# Altium PCB Motor_Driver.PcbDoc
Units mil, origin at the board's own origin, x right, y up, seen from the top; angles counter-clockwise.
Board outline 6000 x 4000 mil, 2 copper layers (Top Layer, Bottom Layer); 42 components, 46 nets, 176 pads, 0 vias.
Unrouted connection lines stored in the file: 73.
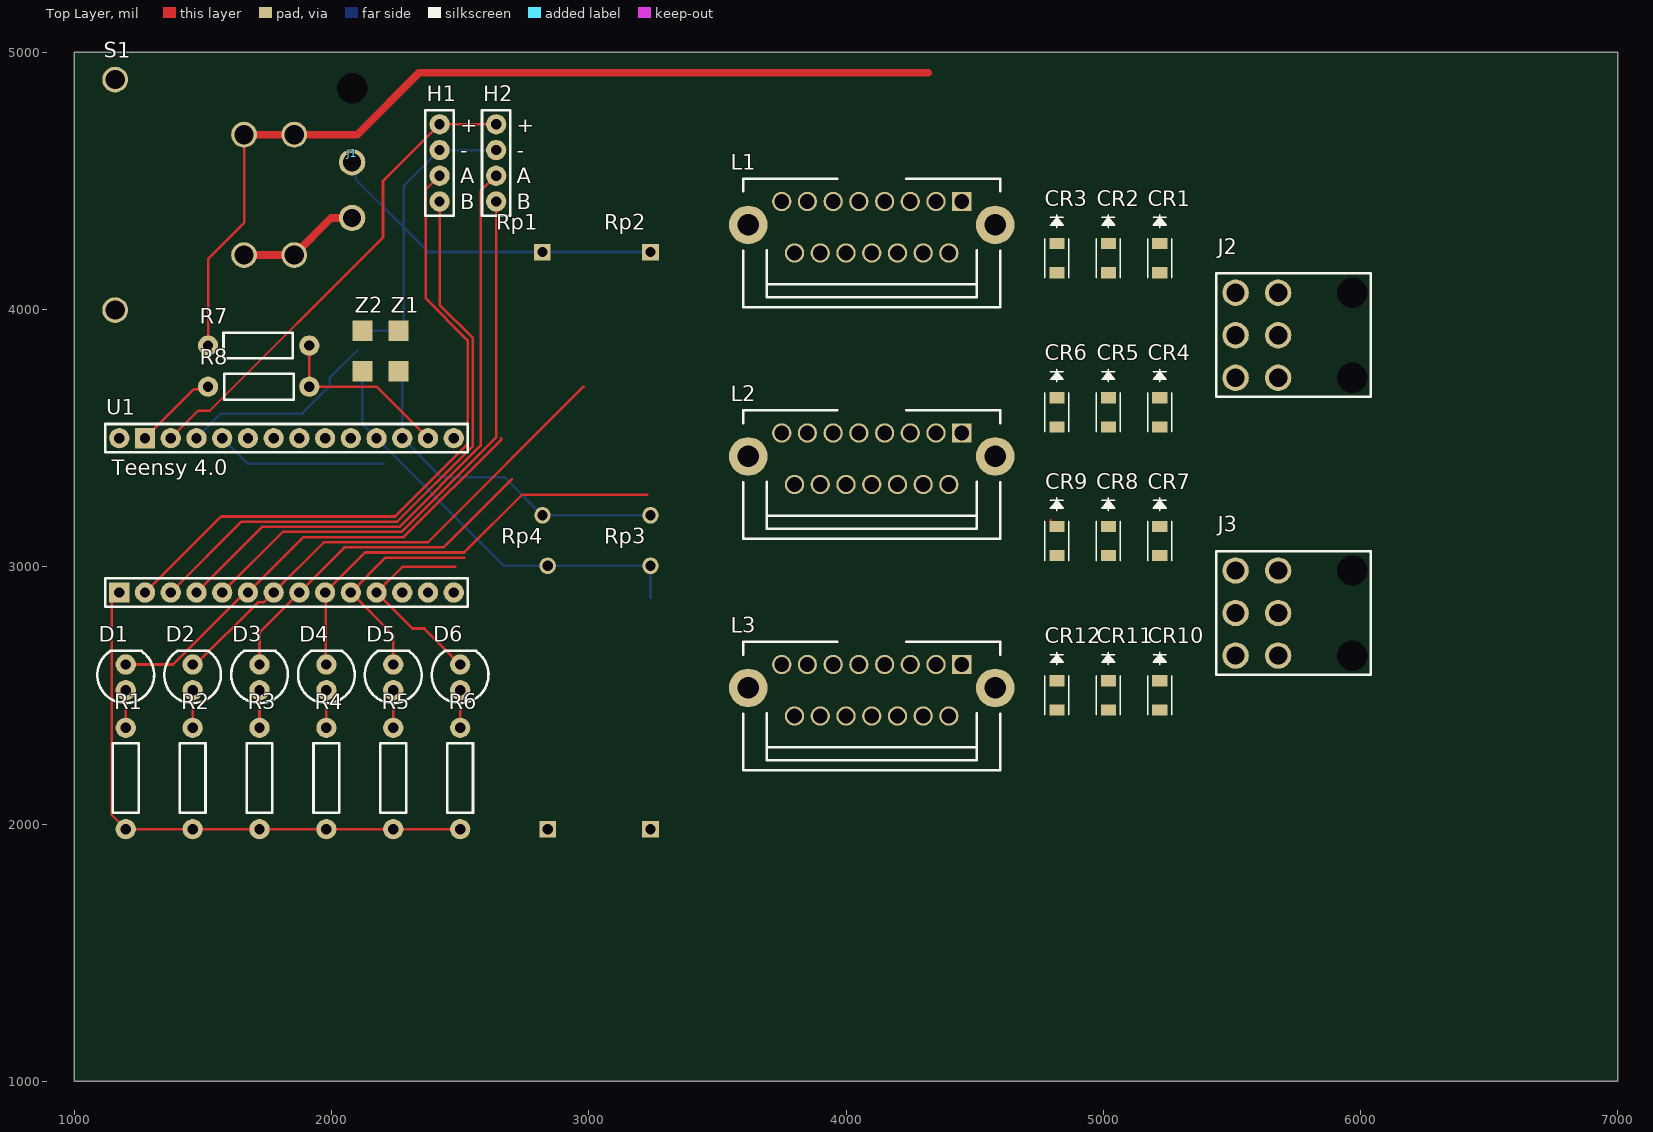
[diagram p0: Top Layer view]
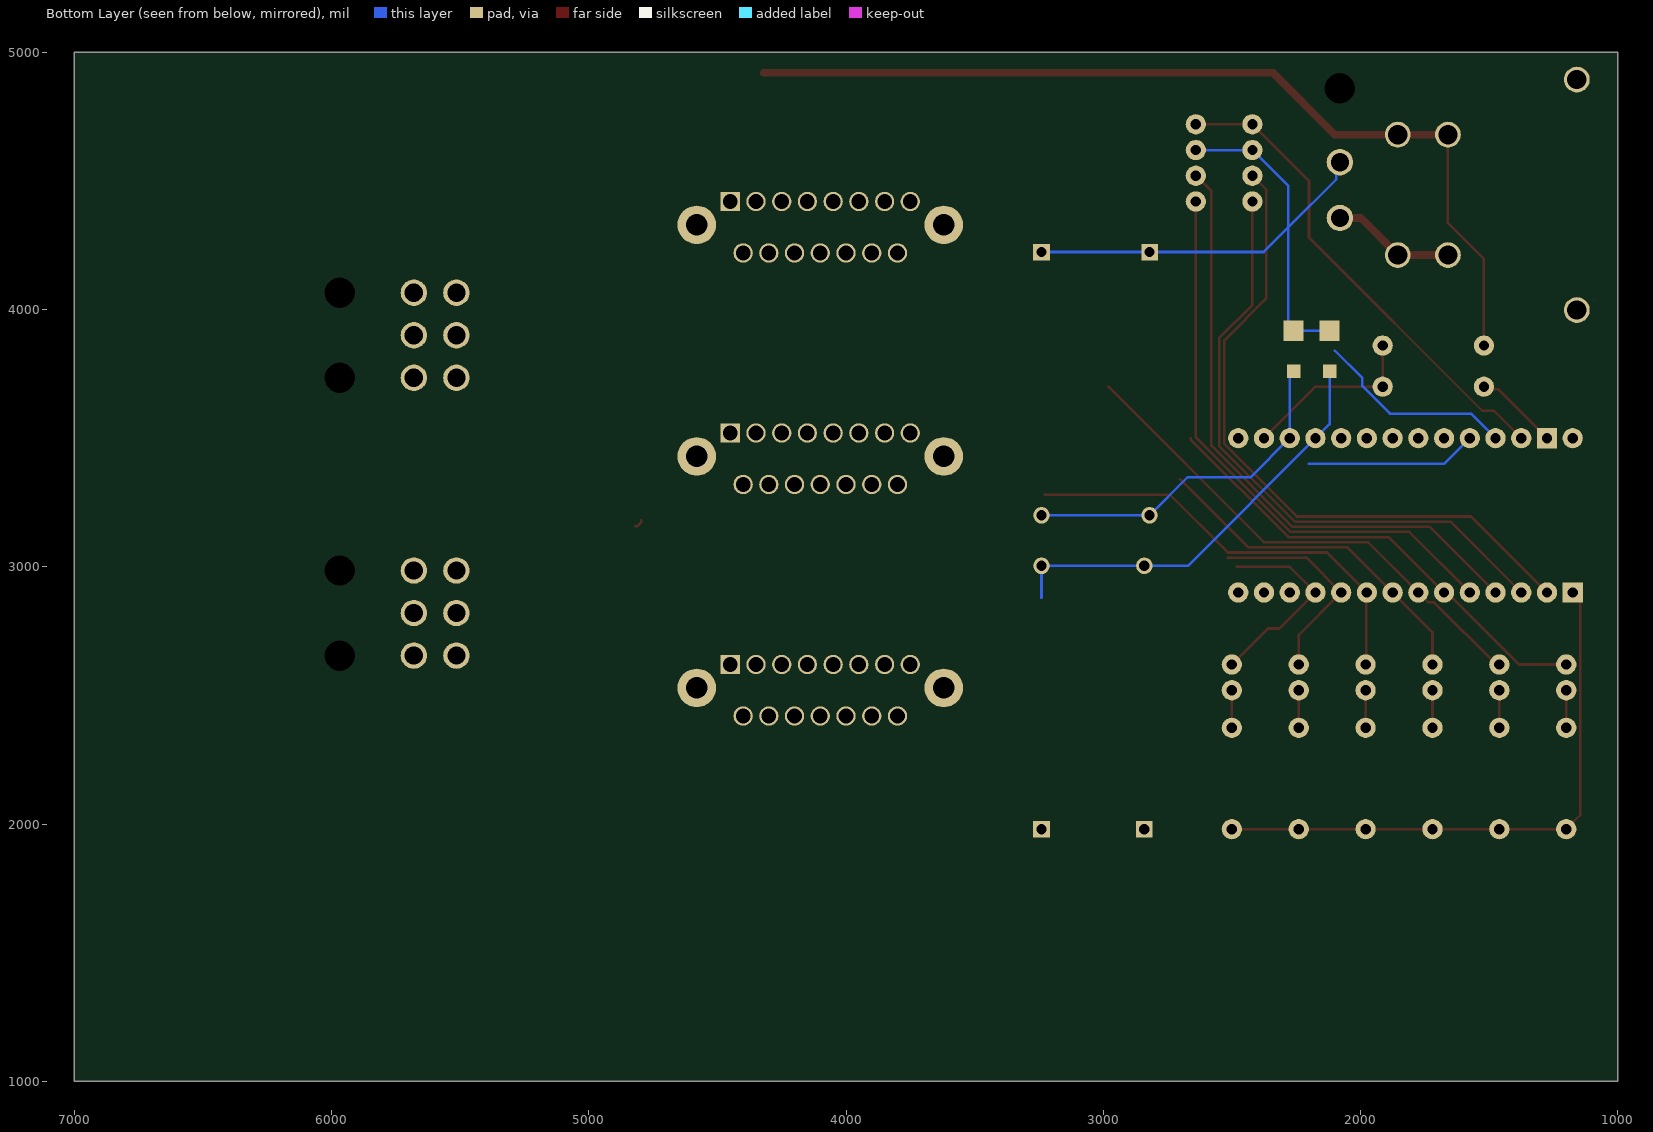
[diagram p1: Bottom Layer view, seen from below]

## Layer stack, top to bottom
Top Solder: solder mask 0.4, Solder Resist, Dk 3.5
Top Layer: signal copper 1.4
Dielectric 1: dielectric 12.6, FR-4, Dk 4.8
Bottom Layer: signal copper 1.4
Bottom Solder: solder mask 0.4, Solder Resist, Dk 3.5

## Board outline
1000,1000 7000,1000 7000,5000 1000,5000
cut-out: 5835,65
cut-out: 1095,4040

## Design rules (kind name [scope] priority, off if disabled: settings)
Clearance [All] p1: gap=10 ignorepadtopadclearanceinfootprint=FALSE except(0: Arc-Hole Track-Hole SMDPad-Hole THPad-Hole Via-Hole Fill-Hole Poly-Hole Region-Hole Text-Hole)
PolygonConnect [All] p1: connectstyle=Relief reliefconductorwidth=10 reliefentries=4 polygonreliefangle="90 Angle" airgapwidth=10
RoutingVias [All] p1: holewidth=28 width=50 viastyle="Through Hole" minholewidth=28 minwidth=50 maxholewidth=28 maxwidth=50
SolderMaskExpansion [All] p1: expansion=4
Width [All] p1: maxlimit=10 minlimit=10 preferedwidth=10
30 further rules are at their usual default settings.

## Components (designator, comment, footprint, x,y, rotation, side; value= is the part's Value field where it differs from the comment)
CR1 "Part Number: SD1206S040S2R0" SD1206 5220,4200 r270 top value=Value
CR2 "Part Number: SD1206S040S2R0" SD1206 5020,4200 r270 top value=Value
CR3 "Part Number: SD1206S040S2R0" SD1206 4820,4200 r270 top value=Value
CR4 "Part Number: SD1206S040S2R0" SD1206 5220,3600 r270 top value=Value
CR5 "Part Number: SD1206S040S2R0" SD1206 5020,3600 r270 top value=Value
CR6 "Part Number: SD1206S040S2R0" SD1206 4820,3600 r270 top value=Value
CR7 "Part Number: SD1206S040S2R0" SD1206 5220,3100 r270 top value=Value
CR8 "Part Number: SD1206S040S2R0" SD1206 5020,3100 r270 top value=Value
CR9 "Part Number: SD1206S040S2R0" SD1206 4820,3100 r270 top value=Value
CR10 "Part Number: SD1206S040S2R0" SD1206 5220,2500 r270 top value=Value
CR11 "Part Number: SD1206S040S2R0" SD1206 5020,2500 r270 top value=Value
CR12 "Part Number: SD1206S040S2R0" SD1206 4820,2500 r270 top value=Value
D1 "Test LED" "Test LED" 1200,2620 r180 top
D2 "Test LED" "Test LED" 1460,2620 r180 top
D3 "Test LED" "Test LED" 1720,2620 r180 top
D4 "Test LED" "Test LED" 1980,2620 r180 top
D5 "Test LED" "Test LED" 2240,2620 r180 top
D6 "Test LED" "Test LED" 2500,2620 r180 top
H1 "Header 4" "4 Header" 2420,4420 r0 top
H2 "Header 4" "4 Header" 2640,4420 r0 top
J1 "Molex2" "MOLEX MINI2" 2080,4860 r180 top
J2 "Molex Mini-Fit Jr 45732" "Molex Mini-Fit Jr" 5514.65,4065.35 r270 top
J3 "Molex Mini-Fit Jr 45732" "Molex Mini-Fit Jr" 5514.65,2985.35 r270 top
L1 "Q-LN298HS" Multiwatt15_V_ELEC391HS 4100,4220 r180 top value=Value
L2 "Q-LN298HS" Multiwatt15_V_ELEC391HS 4100,3320 r180 top value=Value
L3 "Q-LN298HS" Multiwatt15_V_ELEC391HS 4100,2420 r180 top value=Value
R1 "StdRes" StdRes 1200,2373.7 r180 top
R2 "StdRes" StdRes 1460,2373.7 r180 top
R3 "StdRes" StdRes 1720,2373.7 r180 top
R4 "StdRes" StdRes 1980,2373.7 r180 top
R5 "StdRes" StdRes 2240,2373.7 r180 top
R6 "StdRes" StdRes 2500,2373.7 r180 top
R7 "StdRes" StdRes 1520,3860 r270 top
R8 "StdRes" StdRes 1913.7,3700 r90 top
Rp1 "SQP500 Power Resistor" "SQP500 Power Resistor" 2820,4223.62 r180 top
Rp2 "SQP500 Power Resistor" "SQP500 Power Resistor" 3240,4223.62 r180 top
Rp3 "SQP500 Power Resistor" "SQP500 Power Resistor" 3240,1980 r0 top
Rp4 "SQP500 Power Resistor" "SQP500 Power Resistor" 2840,1980 r0 top
S1 "DF Switch" "DF SWITCH" 1158.82,3997.91 r0 top
U1 "Teensy 4.0" "Teensy 4.0" 1175,2900 r0 top
Z1 "Zener, 1.5W, 3.3V, 1SMA5913BT3G" "Zener, 1.5W, 3.3V, 1SMA5913BT3G" 2260,3917.48 r180 top
Z2 "Zener, 1.5W, 3.3V, 1SMA5913BT3G" "Zener, 1.5W, 3.3V, 1SMA5913BT3G" 2120,3917.48 r180 top

## Footprints (in the part's own frame and the unit in brackets; to place one, negate y for a bottom-side part, rotate by r counter-clockwise, add the part's x,y. Pads: shape width x height; smd on the part's side, far side on the other; paste and mask are expansions set on the pad)
"4 Header" [mm]
  round 2 hole 1.02: 1(0,7.62) 2(0,5.08) 3(0,2.54) 4(0,0)
  silkscreen extent -1.4,-1.4 1.4,9.02
"DF SWITCH" [mm]
  round 2.54 hole 1.91: 1(12.73,5.435) 1A(12.73,17.325) 2(17.68,5.435) 2A(17.68,17.325) NC(0,0) NC(0,22.76)
  body extent -4.11,0 14.6,24.89, height 13.08
"MOLEX MINI2" [mm]
  round 1.524 hole 3: 0(0,0)
  round 2.6 hole 1.8: 1(0,7.3) 2(0,12.8)
  body extent -2.62,-6.54 3.18,13.4, height 11.4
"Molex Mini-Fit Jr" [mm] "Molex 0457320001"
  round 2.6 hole 1.8: 1(8.4,4.2) 2(4.2,4.2) 3(0,4.2) 4(8.4,0) 5(4.2,0) 6(0,0)
  round 0 hole 3: ""(0,11.5) ""(8.4,11.5)
  silkscreen extent -1.91,-1.91 10.29,13.34, body extent -3.05,-0.55 11.15,18.08, height 11.4
Multiwatt15_V_ELEC391HS [mil]
  rect 75x75 hole 57: 1(-350,-200)
  round 75 hole 57: 2(-300,0) 3(-250,-200) 4(-200,0) 5(-150,-200) 6(-100,0) 7(-50,-200) 8(0,0) 9(50,-200) 10(100,0) 11(150,-200) 12(200,0) 13(250,-200) 14(300,0) 15(350,-200)
  round 150 hole 83: 16(480,-109) 17(-480,-109)
  silkscreen extent -500,-289 500,211, body extent -385,-200 387,157, height 826
SD1206 [mil]
  rect 43.5x59 smd paste+0 mask+0: 1(-56.75,0) 2(56.75,0)
  silkscreen extent -168,-47 76,47, body extent 0,0 10,10, height 10
"SQP500 Power Resistor" [mm]
  rect 1.63x1.63 hole 1.02: 0(0,0)
  round 1.63 hole 1.02: 1(0,26)
  body extent -4.75,2 4.75,24, height 0.25
StdRes [mm]
  round 2 hole 1.02: 0(0,0) 1(0,10)
  silkscreen extent -1.27,1.52 1.27,8.38
"Teensy 4.0" [mm]
  round 2 hole 1.02: 0(2.54,0) 1(5.08,0) 2(7.62,0) 3(10.16,0) 3.3V(5.08,15.24) 4(12.7,0) 5(15.24,0) 6(17.78,0) 7(20.32,0) 8(22.86,0) 9(25.4,0) 10(27.94,0) 11(30.48,0) 12(33.02,0) 13(33.02,15.24) 14(30.48,15.24) 15(27.94,15.24) 16(25.4,15.24) 17(22.86,15.24) 18(20.32,15.24) 19(17.78,15.24) 20(15.24,15.24) 21(12.7,15.24) 22(10.16,15.24) 23(7.62,15.24) Vin(0,15.24)
  rect 2x2 hole 1.02: GND(0,0) GND(2.54,15.24)
  silkscreen extent -1.4,-1.4 34.42,16.64
"Test LED" [mm]
  round 2 hole 1.02: 0(0,0) 1(0,2.54)
  silkscreen extent -2.8,-1.34 2.8,3.81
"Zener, 1.5W, 3.3V, 1SMA5913BT3G" [mm]
  rect 2x2 all layers, no hole mask+0: 0(0,0)
  rect 2x2 / inner rect 1.321x1.321 / far side rect 1.321x1.321 all layers, no hole mask+0: 1(0,4)

## Part data
CR1 CR2 CR3 CR4 CR5 CR6 CR7 CR8 CR9 CR10 CR11 CR12: library part SD1206S040S2R0, Built_By=EMA_UL_Team, Copyright="Copyright (C) 2018 Accelerated Designs. All rights reserved", Manufacturer_Part_Number=SD1206S040S2R0, RefDes=RefDes, Type=DEV, Vendor="AVX Corporation"
J2 J3: library part "Molex 0457320001", "Molex CONN HEADER R/A 6POS 4.2MM", Supplier Part Number 1=WM10850-ND, Supplier 1=Digi-Key
L1 L2 L3: "LN298 - IC Bridge Driver Par 15Multiwatt", Current - Output / Channel=2A, Current - Peak Output=3A, Manufacturer_Part_Number=L298N, On-State Resistance=-, Operating Temperature="-25°C ~ 130°C", Package / Case="Multiwatt-15 (Vertical, Bent and Staggered Leads)", Supplier Device Package=15-Multiwatt, Voltage - Supply="4.5 V ~ 46 V", C="Copyright (C) 2015 Accelerated Designs. All rights reserved", ComponentLink1Description="Datasheet (ELEC391)", ComponentLink1URL=http://www.st.com/content/ccc/resource/technical/document/datasheet/82/cc/3f/39/0a/29/4d/f0/CD00000240.pdf/files/CD00000240.pdf/jcr:content/translations/en.CD00000240.pdf, Copyright="Copyright (C) 2015 Accelerated Designs. All rights reserved", DataSheet=http://www.st.com/internet/com/TECHNICAL_RESOURCES/TECHNICAL_LITERATURE/DATASHEET/CD00000240.pdf, Input Type=Non-Inverting, Mounting Type="Through Hole", Number of Outputs=4, Packaging=Tube, Quantity_Available=5651, RefDes=RefDes, Type=Type, Vendor="ST Microelectronics"

## Nets (pads, with @x,y where several pads share a name; then routed paths per layer and width w, separated by ;. In a path a pad name is that pad's centre, name@x,y a point inside that pad or via, vN(x,y) a via of type N, cw(c..) or ccw(c..) an arc to the next point about the centre after c; other vN are vias at no path point)
10: U1.10
11: U1.11
12: U1.12
13: U1.13
17: U1.17
18: U1.18
19: U1.19
20: U1.20
21: U1.21
A0: R7.1 R8.0 U1.14 | length 711.2
  Top Layer w10: R7.1@1911.2,3857.5 R7.1 R8.0 2175,3700 U1.14 U1.14@2377.5,3502.5
"Current Sense 1": L1.1 L1.15 L2.1 Rp1.1 Rp2.1 U1.15 Z1.1 | length 1355.5
  Bottom Layer w10: Z1.1 2275,3745 U1.15 2426.39,3348.61 2671.39,3348.61 Rp1.1 Rp2.1
"Current Sense 2": L2.15 L3.1 L3.15 Rp3.1 Rp4.1 U1.16 Z2.1 | length 1677.5
  Bottom Layer w10: Z2.1 2120,3555 U1.16 2671.38,3003.62 Rp4.1 Rp3.1 3240,2879.48
GND: CR4.2 CR5.2 CR6.2 CR10.2 CR11.2 CR12.2 H1.2 H2.2 J1.1 L1.7 L1.8 L1.12 L2.7 L2.8 L2.12 L3.7 L3.8 L3.12 R1.1 R2.1 R3.1 R4.1 R5.1 R6.1 R8.1 Rp1.0 Rp2.0 Rp3.0 Rp4.0 U1.GND Z1.0 Z2.0 | length 5088.2
  Top Layer w10: U1.GND@1175,2900 1145.63,2870.63 1145.63,2034.37 R1.1 R2.1 R3.1 R4.1 R5.1 R6.1 ; U1.GND@1275,3500 1465.63,3690.63 1510.63,3690.63 R8.1
  Bottom Layer w10: U1.GND@1145.63,2870.63 U1.GND@1175,2900 ; J1.1 2093.58,4559.02 2093.58,4506.42 2280,4320 ; Z2.0 Z1.0 2280,3937.48 2280,4320 ; H2.2 H1.2 2280,4480 2280,4320 ; Rp2.0 Rp1.0 2376.38,4223.62 2280,4320
M1_1: D1.0 L1.5 U1.4 | length 1827.5
  Top Layer w10: D1.0 1383.11,2620 1663.11,2900 U1.4 1890.32,3115.32 2280.34,3115.32 2660,3494.97 2660,3500
M1_1_Out: CR1.2 CR4.1 J2.1 L1.2
M1_1_Return: J2.4 L1.3
M1_2: D2.0 L1.10 U1.5 | length 1967.4
  Top Layer w10: D2.0 1471.89,2620 1713.45,2861.55 1736.55,2861.55 U1.5 1970.32,3095.32 2375.32,3095.32 2980,3700
M1_2_Out: CR2.2 CR5.1 J2.2 L1.13
M1_2_Return: J2.5 L1.14
M1_3: D3.0 L2.5 U1.6 | length 1351.5
  Top Layer w10: D3.0 1720,2745 U1.6 2050.32,3075.32 2435.32,3075.32 2700,3340
M1_3_Out: CR3.2 CR6.1 J2.3 L2.2
M1_3_Return: J2.6 L2.3
M1_A: H1.3 U1.0 | length 2626.4
  Top Layer w10: U1.0 1570.32,3195.32 2247.21,3195.32 2529.37,3477.48 2529.37,3880.38 2365.63,4044.12 2365.63,4465.63 H1.3
M1_B: H1.4 U1.1 | length 2414.5
  Top Layer w10: U1.1 1650.32,3175.32 2255.49,3175.32 2549.37,3469.2 2549.37,3888.67 2420,4018.04 H1.4
M1_EN: L1.6 L1.11 L2.6 U1.23 | length 801.3
  Bottom Layer w10: U1.23 1570.32,3595.32 1885.91,3595.32 1992.95,3702.36 1992.95,3732.95 2100,3840 ; L1.11 L1.11@3962.44,4432.44
M2_1: D4.0 L2.10 U1.7 | length 1691.1
  Top Layer w10: D4.0 1977.5,2622.5 1977.5,2897.5 U1.7 2130.32,3055.32 2515.32,3055.32 2740,3280 3226.59,3280
M2_1_Out: CR7.2 CR10.1 J3.1 L2.13
M2_1_Return: J3.4 L2.14
M2_2: D5.0 L3.5 U1.8 | length 844.7
  Top Layer w10: D5.0 2240,2735 U1.8 2210.32,3035.32 2515.32,3035.32
M2_2_Out: CR8.2 CR11.1 J3.2 L3.2
M2_2_Return: J3.5 L3.3
M2_3: D6.0 L3.10 U1.9 | length 787.4
  Top Layer w10: 2480,3000 2275,3000 U1.9 2315,2760 2360,2760 D6.0
M2_3_Out: CR9.2 CR12.1 J3.3 L3.13
M2_3_Return: J3.6 L3.14
M2_A: H2.3 U1.2 | length 2415.1
  Top Layer w10: U1.2 1730.32,3155.32 2263.78,3155.32 2580,3471.54 2580,4460 H2.3
M2_B: H2.4 U1.3 | length 2231.6
  Top Layer w10: U1.3 1810.32,3135.32 2272.06,3135.32 2640,3503.26 H2.4
M2_EN: L2.11 L3.6 L3.11 U1.22 | length 666.4
  Bottom Layer w10: U1.22 1675,3400 2200,3400
NetD1_1: D1.1 R1.0 | length 146.3
  Top Layer w10: R1.0 D1.1
NetD2_1: D2.1 R2.0 | length 146.3
  Top Layer w10: R2.0 D2.1
NetD3_1: D3.1 R3.0 | length 146.3
  Top Layer w10: R3.0 D3.1
NetD4_1: D4.1 R4.0 | length 146.3
  Top Layer w10: R4.0 D4.1
NetD5_1: D5.1 R5.0 | length 146.3
  Top Layer w10: R5.0 D5.1
NetD6_1: D6.1 R6.0 | length 146.3
  Top Layer w10: R6.0 D6.1
NetJ1_2: J1.2 S1.1 S1.2 | length 491.2
  Top Layer w30: S1.1 S1.2 1999.06,4356.06 J1.2
  Bottom Layer w10: S1.2 S1.2@1854.88,4217.62 ; J1.2@2080,4350.33 J1.2
VCC: CR1.1 CR2.1 CR3.1 CR7.1 CR8.1 CR9.1 L1.4 L2.4 L3.4 R7.0 S1.1A S1.2A | length 3694.2
  Top Layer w10: R7.0 1520,4197.12 1660,4337.12 S1.1A ; 4795.5,3181.25 4795.5,3173.5 4812.25,3156.75 CR9.1
  Top Layer w30: S1.1A S1.2A 2100,4680 2340,4920 4320,4920
  Bottom Layer w10: L3.4 L3.4@4312.44,2407.56
VDD: H1.1 H2.1 L1.9 L2.9 L3.9 U1.3.3V | length 1899.2
  Top Layer w10: U1.3.3V 1481.58,3606.58 1526.58,3606.58 2200,4280 2200,4500 H1.1 H2.1
pads on no net: J1.0 J2. J3. L1.16 L1.17 L2.16 L2.17 L3.16 L3.17 S1.NC U1.Vin

## Text inside footprints (layer, text, board x,y; h text height)
H1: Top Overlay "B" at 2500,4390 h60; Top Overlay "A" at 2500,4490 h60; Top Overlay "-" at 2500,4590 h60; Top Overlay "+" at 2500,4690 h60
H2: Top Overlay "B" at 2720,4390 h60; Top Overlay "A" at 2720,4490 h60; Top Overlay "-" at 2720,4590 h60; Top Overlay "+" at 2720,4690 h60